# Altium PCB PCB1.PcbDoc (part 3 of 10)
Units mm, origin at the board's own origin, x right, y up, seen from the top; angles counter-clockwise.
Board outline 171.83 x 244.04 mm, 2 copper layers (Top Layer, Bottom Layer); 100 components, 186 nets, 878 pads, 221 vias.
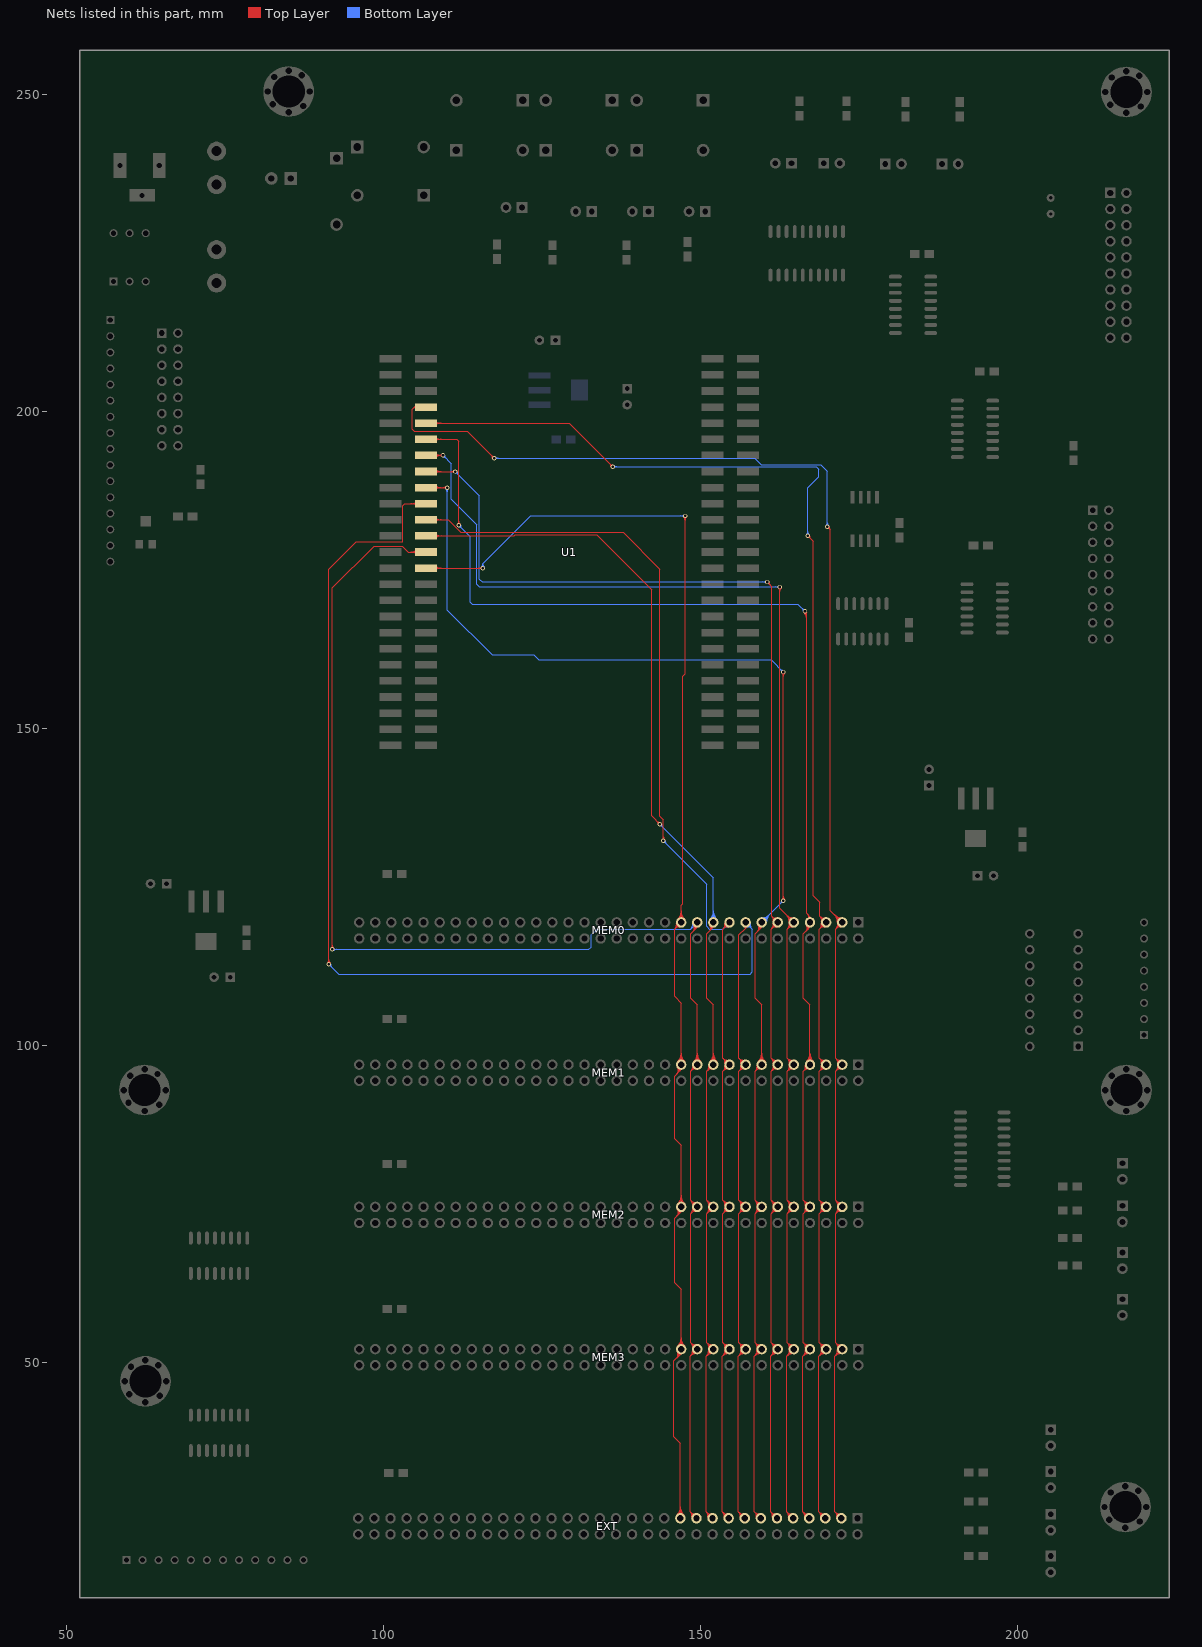
[diagram p3: the nets of this part, all layers, seen from the top]

## Via types
v1: diameter 0.7, hole 0.4, Top Layer to Bottom Layer, 221 vias

## Nets (pads, with @x,y where several pads share a name; then routed paths per layer and width w, separated by ;. In a path a pad name is that pad's centre, name@x,y a point inside that pad or via, vN(x,y) a via of type N, cw(c..) or ccw(c..) an arc to the next point about the centre after c; other vN are vias at no path point) (continued)
A01: EXT.3 MEM0.3 MEM1.3 MEM2.3 MEM3.3 U1.58 | length 294
  Top Layer w0.152: U1.58@105.026,200.518 ccw(c104.839,200.465) 104.839,200.66 ; U1.58@105.026,200.802 cw(c104.839,200.855) 104.839,200.66 ; U1.58@106.68,200.66 104.838,200.66 ; v1@117.176,192.608 ccw(c116.515,192.608) 116.982,193.076 ccw(c117.45,193.543) v1@117.45,192.882 ; v1(117.45,192.608) 113.208,196.85 104.838,196.85 104.521,197.167 104.521,200.343 104.838,200.66 ; v1@170.002,181.514 cw(c170.002,180.853) 170.47,181.32 cw(c170.937,181.788) v1@170.276,181.788 ; v1(170.002,181.788) 170.485,181.305 170.485,121.234 MEM0.3@172.339,119.38 171.298,118.339 ; EXT.3@171.475,25.531 ccw(c170.486,25.706) 171.196,26.416 ; MEM0.3@171.59,119.38 ccw(c169.782,119.38) 171.061,120.658 ccw(c172.339,121.937) MEM0.3@172.339,120.129 ; MEM3.3@171.593,52.008 cw(c170.227,51.896) 171.196,50.927 ; MEM3.3@171.599,52.186 ccw(c170.538,52.352) 171.298,53.111 ; MEM2.3@171.599,74.391 cw(c170.538,74.225) 171.298,73.465 ; MEM2.3@171.599,74.623 ccw(c170.538,74.789) 171.298,75.548 ; MEM1.3@171.599,96.827 cw(c170.538,96.661) 171.298,95.902 ; MEM1.3@171.599,97.059 ccw(c170.538,97.225) 171.298,97.985 ; MEM0.3@171.599,119.264 cw(c170.538,119.098) 171.298,118.339 ; EXT.3@171.625,25.504 ccw(c170.837,25.644) 171.403,26.209 ccw(c171.968,26.775) EXT.3@172.108,25.987 ; MEM0.3@171.743,119.38 ccw(c170.303,119.38) 171.321,120.398 ccw(c172.339,121.416) MEM0.3@172.339,119.976 ; MEM3.3@171.745,52.021 cw(c170.657,51.931) 171.429,51.16 cw(c172.2,50.388) MEM3.3@172.29,51.476 ; MEM3.3@171.75,52.162 ccw(c170.905,52.295) 171.51,52.899 ccw(c172.114,53.504) MEM3.3@172.247,52.659 ; MEM2.3@171.75,74.414 cw(c170.905,74.282) 171.51,73.677 cw(c172.114,73.073) MEM2.3@172.247,73.917 ; MEM2.3@171.75,74.599 ccw(c170.905,74.731) 171.51,75.336 ccw(c172.114,75.941) MEM2.3@172.247,75.096 ; MEM1.3@171.75,96.851 cw(c170.905,96.719) 171.51,96.114 cw(c172.114,95.509) MEM1.3@172.247,96.354 ; MEM1.3@171.75,97.036 ccw(c170.905,97.168) 171.51,97.773 ccw(c172.114,98.377) MEM1.3@172.247,97.533 ; MEM0.3@171.75,119.288 cw(c170.905,119.155) 171.51,118.551 cw(c172.114,117.946) MEM0.3@172.247,118.791 ; EXT.3@171.775,25.478 ccw(c171.189,25.581) 171.61,26.002 ccw(c172.031,26.423) EXT.3@172.134,25.837 ; MEM0.3@171.895,119.38 ccw(c170.823,119.38) 171.581,120.138 ccw(c172.339,120.896) MEM0.3@172.339,119.824 ; MEM3.3@171.897,52.034 cw(c171.087,51.967) 171.661,51.392 cw(c172.236,50.818) MEM3.3@172.303,51.628 ; MEM3.3@171.9,52.139 ccw(c171.271,52.237) 171.722,52.687 ccw(c172.172,53.138) MEM3.3@172.27,52.509 ; MEM2.3@171.9,74.438 cw(c171.271,74.339) 171.722,73.889 cw(c172.172,73.439) MEM2.3@172.27,74.068 ; MEM2.3@171.9,74.575 ccw(c171.271,74.674) 171.722,75.124 ccw(c172.172,75.574) MEM2.3@172.27,74.945 ; MEM1.3@171.9,96.875 cw(c171.271,96.776) 171.722,96.326 cw(c172.172,95.876) MEM1.3@172.27,96.505 ; MEM1.3@171.9,97.012 ccw(c171.271,97.111) 171.722,97.561 ccw(c172.172,98.011) MEM1.3@172.27,97.382 ; MEM0.3@171.9,119.311 cw(c171.271,119.213) 171.722,118.763 cw(c172.172,118.312) MEM0.3@172.27,118.941 ; EXT.3@172.081,26.137 cw(c171.906,27.126) 171.196,26.416 ; EXT.3@172.212,25.4 171.196,26.416 ; MEM3.3@172.223,52.81 cw(c172.057,53.871) 171.298,53.111 ; MEM2.3@172.223,73.767 ccw(c172.057,72.706) 171.298,73.465 ; MEM2.3@172.223,75.246 cw(c172.057,76.307) 171.298,75.548 ; MEM1.3@172.223,96.204 ccw(c172.057,95.143) 171.298,95.902 ; MEM1.3@172.223,97.683 cw(c172.057,98.744) 171.298,97.985 ; MEM0.3@172.223,118.64 ccw(c172.057,117.579) 171.298,118.339 ; MEM3.3@172.277,51.324 ccw(c172.165,49.958) 171.196,50.927 ; 171.196,26.416 171.196,50.927 ; 171.196,50.927 MEM3.3@172.339,52.07 171.298,53.111 ; 171.298,53.111 171.298,73.465 ; 171.298,73.465 MEM2.3@172.339,74.507 171.298,75.548 ; 171.298,75.548 171.298,95.902 ; 171.298,95.902 MEM1.3@172.339,96.943 171.298,97.985 ; 171.298,97.985 171.298,118.339
  Bottom Layer w0.152: v1(117.45,192.608) 158.525,192.608 159.592,191.541 168.971,191.541 170.002,190.509 v1(170.002,181.788) ; v1@117.643,192.415 cw(c118.111,191.947) 118.111,192.608 cw(c118.111,193.269) v1@117.643,192.802 ; v1@169.809,181.981 ccw(c169.341,182.449) 170.002,182.449 ccw(c170.663,182.449) v1@170.196,181.981
A02: EXT.5 MEM0.5 MEM1.5 MEM2.5 MEM3.5 U1.60 | length 287.1
  Top Layer w0.152: U1.60@106.68,198.12 129.286,198.12 v1(136.145,191.261) ; U1.60@108.093,197.857 cw(c108.727,197.223) 108.727,198.12 cw(c108.727,199.017) U1.60@108.093,198.383 ; U1.60@108.2,197.75 cw(c109.095,196.855) 109.095,198.12 cw(c109.095,199.385) U1.60@108.2,198.49 ; v1@135.871,191.261 ccw(c135.21,191.261) 135.677,191.729 ccw(c136.145,192.196) v1@136.145,191.535 ; v1@166.903,180.092 cw(c166.903,179.431) 167.371,179.898 cw(c167.838,180.365) v1@167.177,180.365 ; v1(166.903,180.365) 167.767,179.502 167.767,123.571 168.808,122.53 168.808,120.371 ; EXT.5@168.935,25.531 ccw(c167.946,25.706) 168.656,26.416 ; MEM3.5@169.053,52.008 cw(c167.687,51.896) 168.656,50.927 ; MEM3.5@169.059,52.186 ccw(c167.998,52.352) 168.758,53.111 ; MEM2.5@169.059,74.391 cw(c167.998,74.225) 168.758,73.465 ; MEM2.5@169.059,74.623 ccw(c167.998,74.789) 168.758,75.548 ; MEM1.5@169.059,96.827 cw(c167.998,96.661) 168.758,95.902 ; MEM1.5@169.059,97.059 ccw(c167.998,97.225) 168.758,97.985 ; MEM0.5@169.059,119.264 cw(c167.998,119.098) 168.758,118.339 ; MEM0.5@169.065,119.526 ccw(c168.147,119.709) 168.808,120.371 ; EXT.5@169.085,25.504 ccw(c168.297,25.644) 168.863,26.209 ccw(c169.428,26.775) EXT.5@169.568,25.987 ; MEM3.5@169.205,52.021 cw(c168.117,51.931) 168.889,51.16 cw(c169.66,50.388) MEM3.5@169.75,51.476 ; MEM3.5@169.21,52.162 ccw(c168.365,52.295) 168.97,52.899 ccw(c169.574,53.504) MEM3.5@169.707,52.659 ; MEM2.5@169.21,74.414 cw(c168.365,74.282) 168.97,73.677 cw(c169.574,73.073) MEM2.5@169.707,73.917 ; MEM2.5@169.21,74.599 ccw(c168.365,74.731) 168.97,75.336 ccw(c169.574,75.941) MEM2.5@169.707,75.096 ; MEM1.5@169.21,96.851 cw(c168.365,96.719) 168.97,96.114 cw(c169.574,95.509) MEM1.5@169.707,96.354 ; MEM1.5@169.21,97.036 ccw(c168.365,97.168) 168.97,97.773 ccw(c169.574,98.377) MEM1.5@169.707,97.533 ; MEM0.5@169.21,119.288 cw(c168.365,119.155) 168.97,118.551 cw(c169.574,117.946) MEM0.5@169.707,118.791 ; MEM0.5@169.214,119.496 ccw(c168.483,119.642) 169.01,120.169 ccw(c169.537,120.696) MEM0.5@169.683,119.965 ; EXT.5@169.235,25.478 ccw(c168.649,25.581) 169.07,26.002 ccw(c169.491,26.423) EXT.5@169.594,25.837 ; MEM3.5@169.357,52.034 cw(c168.547,51.967) 169.121,51.392 cw(c169.696,50.818) MEM3.5@169.763,51.628 ; MEM3.5@169.36,52.139 ccw(c168.731,52.237) 169.182,52.687 ccw(c169.632,53.138) MEM3.5@169.73,52.509 ; MEM2.5@169.36,74.438 cw(c168.731,74.339) 169.182,73.889 cw(c169.632,73.439) MEM2.5@169.73,74.068 ; MEM2.5@169.36,74.575 ccw(c168.731,74.674) 169.182,75.124 ccw(c169.632,75.574) MEM2.5@169.73,74.945 ; MEM1.5@169.36,96.875 cw(c168.731,96.776) 169.182,96.326 cw(c169.632,95.876) MEM1.5@169.73,96.505 ; MEM1.5@169.36,97.012 ccw(c168.731,97.111) 169.182,97.561 ccw(c169.632,98.011) MEM1.5@169.73,97.382 ; MEM0.5@169.36,119.311 cw(c168.731,119.213) 169.182,118.763 cw(c169.632,118.312) MEM0.5@169.73,118.941 ; MEM0.5@169.364,119.467 ccw(c168.819,119.575) 169.212,119.967 ccw(c169.604,120.36) MEM0.5@169.712,119.815 ; EXT.5@169.541,26.137 cw(c169.366,27.126) 168.656,26.416 ; MEM0.5@169.653,120.114 cw(c169.47,121.032) 168.808,120.371 ; EXT.5@169.672,25.4 168.656,26.416 ; MEM3.5@169.683,52.81 cw(c169.517,53.871) 168.758,53.111 ; MEM2.5@169.683,73.767 ccw(c169.517,72.706) 168.758,73.465 ; MEM2.5@169.683,75.246 cw(c169.517,76.307) 168.758,75.548 ; MEM1.5@169.683,96.204 ccw(c169.517,95.143) 168.758,95.902 ; MEM1.5@169.683,97.683 cw(c169.517,98.744) 168.758,97.985 ; MEM0.5@169.683,118.64 ccw(c169.517,117.579) 168.758,118.339 ; MEM3.5@169.737,51.324 ccw(c169.625,49.958) 168.656,50.927 ; 168.656,26.416 168.656,50.927 ; 168.656,50.927 MEM3.5@169.799,52.07 168.758,53.111 ; 168.758,53.111 168.758,73.465 ; 168.758,73.465 MEM2.5@169.799,74.507 168.758,75.548 ; 168.758,75.548 168.758,95.902 ; 168.758,95.902 MEM1.5@169.799,96.943 168.758,97.985 ; 168.758,97.985 168.758,118.339 ; 168.758,118.339 MEM0.5@169.799,119.38 168.808,120.371
  Bottom Layer w0.152: v1(136.145,191.261) 168.275,191.261 168.656,190.88 168.656,189.662 166.903,187.909 v1(166.903,180.365) ; v1@136.338,191.068 cw(c136.806,190.6) 136.806,191.261 cw(c136.806,191.922) v1@136.338,191.455 ; v1@166.71,180.559 ccw(c166.242,181.026) 166.903,181.026 ccw(c167.564,181.026) v1@167.097,180.559
A03: EXT.7 MEM0.7 MEM1.7 MEM2.7 MEM3.7 U1.62 | length 287.2
  Top Layer w0.152: U1.62@106.68,195.58 111.544,195.58 111.862,195.262 v1(111.862,182.016) ; U1.62@108.093,195.317 cw(c108.727,194.683) 108.727,195.58 cw(c108.727,196.477) U1.62@108.093,195.843 ; U1.62@108.2,195.21 cw(c109.095,194.315) 109.095,195.58 cw(c109.095,196.845) U1.62@108.2,195.95 ; v1@111.668,182.21 ccw(c111.201,182.677) 111.862,182.677 ccw(c112.523,182.677) v1@112.055,182.21 ; v1@166.278,168.259 cw(c165.197,167.179) 166.726,167.179 ; v1@166.386,168.367 cw(c165.565,167.547) 166.726,167.547 ; EXT.7@166.395,25.531 ccw(c165.406,25.706) 166.116,26.416 ; v1(166.472,168.453) 166.726,168.199 166.726,120.802 167.259,120.269 MEM0.7@167.259,119.38 167.259,118.618 166.218,117.577 166.218,107.417 167.259,106.375 MEM1.7@167.259,96.943 166.218,95.902 ; v1@166.494,168.475 cw(c165.933,167.914) 166.726,167.914 ; MEM3.7@166.513,52.008 cw(c165.147,51.896) 166.116,50.927 ; MEM3.7@166.519,52.186 ccw(c165.458,52.352) 166.218,53.111 ; MEM2.7@166.519,74.391 cw(c165.458,74.225) 166.218,73.465 ; MEM2.7@166.519,74.623 ccw(c165.458,74.789) 166.218,75.548 ; MEM1.7@166.519,96.827 cw(c165.458,96.661) 166.218,95.902 ; EXT.7@166.545,25.504 ccw(c165.757,25.644) 166.323,26.209 ccw(c166.888,26.775) EXT.7@167.028,25.987 ; 166.599,117.958 ccw(c166.077,118.479) MEM0.7@166.664,118.926 ; MEM3.7@166.665,52.021 cw(c165.577,51.931) 166.349,51.16 cw(c167.12,50.388) MEM3.7@167.21,51.476 ; MEM3.7@166.67,52.162 ccw(c165.825,52.295) 166.43,52.899 ccw(c167.034,53.504) MEM3.7@167.167,52.659 ; MEM2.7@166.67,74.414 cw(c165.825,74.282) 166.43,73.677 cw(c167.034,73.073) MEM2.7@167.167,73.917 ; MEM2.7@166.67,74.599 ccw(c165.825,74.731) 166.43,75.336 ccw(c167.034,75.941) MEM2.7@167.167,75.096 ; MEM1.7@166.67,96.851 cw(c165.825,96.719) 166.43,96.114 cw(c167.034,95.509) MEM1.7@167.167,96.354 ; EXT.7@166.695,25.478 ccw(c166.109,25.581) 166.53,26.002 ccw(c166.951,26.423) EXT.7@167.054,25.837 ; 166.722,118.081 ccw(c166.217,118.586) MEM0.7@166.785,119.018 ; MEM1.7@166.73,97.473 ccw(c165.451,98.751) 167.259,98.751 ccw(c169.067,98.751) MEM1.7@167.788,97.473 ; 166.753,120.775 cw(c165.94,119.962) MEM0.7@166.992,119.498 ; MEM3.7@166.817,52.034 cw(c166.007,51.967) 166.581,51.392 cw(c167.156,50.818) MEM3.7@167.223,51.628 ; MEM3.7@166.82,52.139 ccw(c166.191,52.237) 166.642,52.687 ccw(c167.092,53.138) MEM3.7@167.19,52.509 ; MEM2.7@166.82,74.438 cw(c166.191,74.339) 166.642,73.889 cw(c167.092,73.439) MEM2.7@167.19,74.068 ; MEM2.7@166.82,74.575 ccw(c166.191,74.674) 166.642,75.124 ccw(c167.092,75.574) MEM2.7@167.19,74.945 ; MEM1.7@166.82,96.875 cw(c166.191,96.776) 166.642,96.326 cw(c167.092,95.876) MEM1.7@167.19,96.505 ; MEM1.7@166.837,97.365 ccw(c165.819,98.383) 167.259,98.383 ccw(c168.699,98.383) MEM1.7@167.681,97.365 ; 166.845,118.204 ccw(c166.357,118.692) MEM0.7@166.906,119.111 ; 166.911,120.617 cw(c166.159,119.865) MEM0.7@167.132,119.436 ; MEM1.7@166.945,97.257 ccw(c166.187,98.015) 167.259,98.015 ccw(c168.331,98.015) MEM1.7@167.573,97.257 ; 166.968,118.327 ccw(c166.497,118.799) MEM0.7@167.027,119.203 ; EXT.7@167.001,26.137 cw(c166.826,27.126) 166.116,26.416 ; 167.068,120.46 cw(c166.377,119.769) MEM0.7@167.271,119.375 ; 167.092,118.451 ccw(c166.637,118.906) MEM0.7@167.148,119.296 ; EXT.7@167.132,25.4 166.116,26.416 ; MEM3.7@167.143,52.81 cw(c166.977,53.871) 166.218,53.111 ; MEM2.7@167.143,73.767 ccw(c166.977,72.706) 166.218,73.465 ; MEM2.7@167.143,75.246 cw(c166.977,76.307) 166.218,75.548 ; MEM1.7@167.143,96.204 ccw(c166.977,95.143) 166.218,95.902 ; MEM3.7@167.197,51.324 ccw(c167.085,49.958) 166.116,50.927 ; 167.225,120.303 cw(c166.595,119.673) MEM0.7@167.411,119.313 ; 166.116,26.416 166.116,50.927 ; 166.116,50.927 MEM3.7@167.259,52.07 166.218,53.111 ; 166.218,53.111 166.218,73.465 ; 166.218,73.465 MEM2.7@167.259,74.507 166.218,75.548 ; 166.218,75.548 166.218,95.902
  Bottom Layer w0.152: v1@111.862,181.743 cw(c111.862,181.082) 112.329,181.549 cw(c112.796,182.016) v1@112.135,182.016 ; v1(111.862,182.016) 113.665,180.213 113.665,169.888 113.983,169.57 165.354,169.57 v1(166.472,168.453) ; v1@166.198,168.453 ccw(c165.537,168.453) 166.004,168.92 ccw(c166.472,169.388) v1@166.472,168.727
A04: EXT.9 MEM0.9 MEM1.9 MEM2.9 MEM3.9 U1.64 | length 278.1
  Top Layer w0.152: U1.64@106.68,193.04 v1(109.372,193.04) ; U1.64@108.093,192.777 cw(c108.727,192.143) 108.727,193.04 cw(c108.727,193.937) U1.64@108.093,193.303 ; U1.64@108.2,192.67 cw(c109.095,191.775) 109.095,193.04 cw(c109.095,194.305) U1.64@108.2,193.41 ; v1@109.179,192.846 ccw(c108.711,192.379) 108.711,193.04 ccw(c108.711,193.701) v1@109.179,193.234 ; v1@162.316,172.095 cw(c161.848,171.627) 162.509,171.627 cw(c163.17,171.627) v1@162.703,172.095 ; v1(162.509,172.288) 162.509,121.59 MEM0.9@164.719,119.38 163.678,118.339 ; EXT.9@163.855,25.531 ccw(c162.866,25.706) 163.576,26.416 ; MEM0.9@163.97,119.38 ccw(c162.162,119.38) 163.441,120.658 ccw(c164.719,121.937) MEM0.9@164.719,120.129 ; MEM3.9@163.973,52.008 cw(c162.607,51.896) 163.576,50.927 ; MEM3.9@163.979,52.186 ccw(c162.918,52.352) 163.678,53.111 ; MEM2.9@163.979,74.391 cw(c162.918,74.225) 163.678,73.465 ; MEM2.9@163.979,74.623 ccw(c162.918,74.789) 163.678,75.548 ; MEM1.9@163.979,96.827 cw(c162.918,96.661) 163.678,95.902 ; MEM1.9@163.979,97.059 ccw(c162.918,97.225) 163.678,97.985 ; MEM0.9@163.979,119.264 cw(c162.918,119.098) 163.678,118.339 ; EXT.9@164.005,25.504 ccw(c163.217,25.644) 163.783,26.209 ccw(c164.348,26.775) EXT.9@164.488,25.987 ; MEM0.9@164.123,119.38 ccw(c162.683,119.38) 163.701,120.398 ccw(c164.719,121.416) MEM0.9@164.719,119.976 ; MEM3.9@164.125,52.021 cw(c163.037,51.931) 163.809,51.16 cw(c164.58,50.388) MEM3.9@164.67,51.476 ; MEM3.9@164.13,52.162 ccw(c163.285,52.295) 163.89,52.899 ccw(c164.494,53.504) MEM3.9@164.627,52.659 ; MEM2.9@164.13,74.414 cw(c163.285,74.282) 163.89,73.677 cw(c164.494,73.073) MEM2.9@164.627,73.917 ; MEM2.9@164.13,74.599 ccw(c163.285,74.731) 163.89,75.336 ccw(c164.494,75.941) MEM2.9@164.627,75.096 ; MEM1.9@164.13,96.851 cw(c163.285,96.719) 163.89,96.114 cw(c164.494,95.509) MEM1.9@164.627,96.354 ; MEM1.9@164.13,97.036 ccw(c163.285,97.168) 163.89,97.773 ccw(c164.494,98.377) MEM1.9@164.627,97.533 ; MEM0.9@164.13,119.288 cw(c163.285,119.155) 163.89,118.551 cw(c164.494,117.946) MEM0.9@164.627,118.791 ; EXT.9@164.155,25.478 ccw(c163.569,25.581) 163.99,26.002 ccw(c164.411,26.423) EXT.9@164.514,25.837 ; MEM0.9@164.275,119.38 ccw(c163.203,119.38) 163.961,120.138 ccw(c164.719,120.896) MEM0.9@164.719,119.824 ; MEM3.9@164.277,52.034 cw(c163.467,51.967) 164.041,51.392 cw(c164.616,50.818) MEM3.9@164.683,51.628 ; MEM3.9@164.28,52.139 ccw(c163.651,52.237) 164.102,52.687 ccw(c164.552,53.138) MEM3.9@164.65,52.509 ; MEM2.9@164.28,74.438 cw(c163.651,74.339) 164.102,73.889 cw(c164.552,73.439) MEM2.9@164.65,74.068 ; MEM2.9@164.28,74.575 ccw(c163.651,74.674) 164.102,75.124 ccw(c164.552,75.574) MEM2.9@164.65,74.945 ; MEM1.9@164.28,96.875 cw(c163.651,96.776) 164.102,96.326 cw(c164.552,95.876) MEM1.9@164.65,96.505 ; MEM1.9@164.28,97.012 ccw(c163.651,97.111) 164.102,97.561 ccw(c164.552,98.011) MEM1.9@164.65,97.382 ; MEM0.9@164.28,119.311 cw(c163.651,119.213) 164.102,118.763 cw(c164.552,118.312) MEM0.9@164.65,118.941 ; EXT.9@164.461,26.137 cw(c164.286,27.126) 163.576,26.416 ; EXT.9@164.592,25.4 163.576,26.416 ; MEM3.9@164.603,52.81 cw(c164.437,53.871) 163.678,53.111 ; MEM2.9@164.603,73.767 ccw(c164.437,72.706) 163.678,73.465 ; MEM2.9@164.603,75.246 cw(c164.437,76.307) 163.678,75.548 ; MEM1.9@164.603,96.204 ccw(c164.437,95.143) 163.678,95.902 ; MEM1.9@164.603,97.683 cw(c164.437,98.744) 163.678,97.985 ; MEM0.9@164.603,118.64 ccw(c164.437,117.579) 163.678,118.339 ; MEM3.9@164.657,51.324 ccw(c164.545,49.958) 163.576,50.927 ; 163.576,26.416 163.576,50.927 ; 163.576,50.927 MEM3.9@164.719,52.07 163.678,53.111 ; 163.678,53.111 163.678,73.465 ; 163.678,73.465 MEM2.9@164.719,74.507 163.678,75.548 ; 163.678,75.548 163.678,95.902 ; 163.678,95.902 MEM1.9@164.719,96.943 163.678,97.985 ; 163.678,97.985 163.678,118.339
  Bottom Layer w0.152: v1@109.372,192.766 cw(c109.372,192.105) 109.84,192.573 cw(c110.307,193.04) v1@109.646,193.04 ; v1(109.372,193.04) 110.668,191.745 110.668,186.131 114.681,182.118 114.681,172.72 115.113,172.288 v1(162.509,172.288) ; v1@162.316,172.095 ccw(c161.848,171.627) 161.848,172.288 ccw(c161.848,172.949) v1@162.316,172.482
A05: EXT.11 MEM0.11 MEM1.11 MEM2.11 MEM3.11 U1.66 | length 270.4
  Top Layer w0.152: U1.66@106.68,190.5 v1(111.303,190.5) ; U1.66@108.093,190.237 cw(c108.727,189.603) 108.727,190.5 cw(c108.727,191.397) U1.66@108.093,190.763 ; U1.66@108.2,190.13 cw(c109.095,189.235) 109.095,190.5 cw(c109.095,191.765) U1.66@108.2,190.87 ; v1@111.109,190.306 ccw(c110.642,189.839) 110.642,190.5 ccw(c110.642,191.161) v1@111.109,190.694 ; v1@160.503,172.802 cw(c160.503,172.141) 160.97,172.608 cw(c161.437,173.076) v1@160.776,173.076 ; v1(160.503,173.076) 161.235,172.343 161.235,120.324 ; EXT.11@161.315,25.531 ccw(c160.326,25.706) 161.036,26.416 ; MEM3.11@161.433,52.008 cw(c160.067,51.896) 161.036,50.927 ; MEM3.11@161.439,52.186 ccw(c160.378,52.352) 161.138,53.111 ; MEM2.11@161.439,74.391 cw(c160.378,74.225) 161.138,73.465 ; MEM2.11@161.439,74.623 ccw(c160.378,74.789) 161.138,75.548 ; MEM1.11@161.439,96.827 cw(c160.378,96.661) 161.138,95.902 ; MEM1.11@161.439,97.059 ccw(c160.378,97.225) 161.138,97.985 ; MEM0.11@161.439,119.264 cw(c160.378,119.098) 161.138,118.339 ; MEM0.11@161.451,119.556 ccw(c160.659,119.748) 161.235,120.324 ; EXT.11@161.465,25.504 ccw(c160.677,25.644) 161.243,26.209 ccw(c161.808,26.775) EXT.11@161.948,25.987 ; MEM3.11@161.585,52.021 cw(c160.497,51.931) 161.269,51.16 cw(c162.04,50.388) MEM3.11@162.13,51.476 ; MEM3.11@161.59,52.162 ccw(c160.745,52.295) 161.35,52.899 ccw(c161.954,53.504) MEM3.11@162.087,52.659 ; MEM2.11@161.59,74.414 cw(c160.745,74.282) 161.35,73.677 cw(c161.954,73.073) MEM2.11@162.087,73.917 ; MEM2.11@161.59,74.599 ccw(c160.745,74.731) 161.35,75.336 ccw(c161.954,75.941) MEM2.11@162.087,75.096 ; MEM1.11@161.59,96.851 cw(c160.745,96.719) 161.35,96.114 cw(c161.954,95.509) MEM1.11@162.087,96.354 ; MEM1.11@161.59,97.036 ccw(c160.745,97.168) 161.35,97.773 ccw(c161.954,98.377) MEM1.11@162.087,97.533 ; MEM0.11@161.59,119.288 cw(c160.745,119.155) 161.35,118.551 cw(c161.954,117.946) MEM0.11@162.087,118.791 ; MEM0.11@161.599,119.52 ccw(c160.969,119.673) 161.427,120.132 ccw(c161.886,120.59) MEM0.11@162.039,119.96 ; EXT.11@161.615,25.478 ccw(c161.029,25.581) 161.45,26.002 ccw(c161.871,26.423) EXT.11@161.974,25.837 ; MEM3.11@161.737,52.034 cw(c160.927,51.967) 161.501,51.392 cw(c162.076,50.818) MEM3.11@162.143,51.628 ; MEM3.11@161.74,52.139 ccw(c161.111,52.237) 161.562,52.687 ccw(c162.012,53.138) MEM3.11@162.11,52.509 ; MEM2.11@161.74,74.438 cw(c161.111,74.339) 161.562,73.889 cw(c162.012,73.439) MEM2.11@162.11,74.068 ; MEM2.11@161.74,74.575 ccw(c161.111,74.674) 161.562,75.124 ccw(c162.012,75.574) MEM2.11@162.11,74.945 ; MEM1.11@161.74,96.875 cw(c161.111,96.776) 161.562,96.326 cw(c162.012,95.876) MEM1.11@162.11,96.505 ; MEM1.11@161.74,97.012 ccw(c161.111,97.111) 161.562,97.561 ccw(c162.012,98.011) MEM1.11@162.11,97.382 ; MEM0.11@161.74,119.311 cw(c161.111,119.213) 161.562,118.763 cw(c162.012,118.312) MEM0.11@162.11,118.941 ; EXT.11@161.921,26.137 cw(c161.746,27.126) 161.036,26.416 ; MEM0.11@162.003,120.108 cw(c161.811,120.9) 161.235,120.324 ; EXT.11@162.052,25.4 161.036,26.416 ; MEM3.11@162.063,52.81 cw(c161.897,53.871) 161.138,53.111 ; MEM2.11@162.063,73.767 ccw(c161.897,72.706) 161.138,73.465 ; MEM2.11@162.063,75.246 cw(c161.897,76.307) 161.138,75.548 ; MEM1.11@162.063,96.204 ccw(c161.897,95.143) 161.138,95.902 ; MEM1.11@162.063,97.683 cw(c161.897,98.744) 161.138,97.985 ; MEM0.11@162.063,118.64 ccw(c161.897,117.579) 161.138,118.339 ; MEM3.11@162.117,51.324 ccw(c162.005,49.958) 161.036,50.927 ; 161.036,26.416 161.036,50.927 ; 161.036,50.927 MEM3.11@162.179,52.07 161.138,53.111 ; 161.138,53.111 161.138,73.465 ; 161.138,73.465 MEM2.11@162.179,74.507 161.138,75.548 ; 161.138,75.548 161.138,95.902 ; 161.138,95.902 MEM1.11@162.179,96.943 161.138,97.985 ; 161.138,97.985 161.138,118.339 ; 161.138,118.339 MEM0.11@162.179,119.38 161.235,120.324
  Bottom Layer w0.152: v1@111.303,190.226 cw(c111.303,189.565) 111.77,190.033 cw(c112.238,190.5) v1@111.577,190.5 ; v1(111.303,190.5) 115.113,186.69 115.113,173.533 115.57,173.076 v1(160.503,173.076) ; v1@160.309,172.882 ccw(c159.842,172.415) 159.842,173.076 ccw(c159.842,173.737) v1@160.309,173.269
A06: EXT.13 MEM0.13 MEM1.13 MEM2.13 MEM3.13 U1.68 | length 275.9
  Top Layer w0.152: U1.68@106.68,187.96 v1(110.007,187.96) ; U1.68@108.093,187.697 cw(c108.727,187.063) 108.727,187.96 cw(c108.727,188.857) U1.68@108.093,188.223 ; U1.68@108.2,187.59 cw(c109.095,186.695) 109.095,187.96 cw(c109.095,189.225) U1.68@108.2,188.33 ; v1@109.814,187.766 ccw(c109.346,187.299) 109.346,187.96 ccw(c109.346,188.621) v1@109.814,188.154 ; EXT.13@158.775,25.531 ccw(c157.786,25.706) 158.496,26.416 ; MEM3.13@158.893,52.008 cw(c157.527,51.896) 158.496,50.927 ; MEM3.13@158.899,52.186 ccw(c157.838,52.352) 158.598,53.111 ; MEM2.13@158.899,74.391 cw(c157.838,74.225) 158.598,73.465 ; MEM2.13@158.899,74.623 ccw(c157.838,74.789) 158.598,75.548 ; MEM1.13@158.899,96.827 cw(c157.838,96.661) 158.598,95.902 ; EXT.13@158.925,25.504 ccw(c158.137,25.644) 158.703,26.209 ccw(c159.268,26.775) EXT.13@159.408,25.987 ; 158.979,117.958 ccw(c158.457,118.479) MEM0.13@159.044,118.926 ; MEM3.13@159.045,52.021 cw(c157.957,51.931) 158.729,51.16 cw(c159.5,50.388) MEM3.13@159.59,51.476 ; MEM3.13@159.05,52.162 ccw(c158.205,52.295) 158.81,52.899 ccw(c159.414,53.504) MEM3.13@159.547,52.659 ; MEM2.13@159.05,74.414 cw(c158.205,74.282) 158.81,73.677 cw(c159.414,73.073) MEM2.13@159.547,73.917 ; MEM2.13@159.05,74.599 ccw(c158.205,74.731) 158.81,75.336 ccw(c159.414,75.941) MEM2.13@159.547,75.096 ; MEM1.13@159.05,96.851 cw(c158.205,96.719) 158.81,96.114 cw(c159.414,95.509) MEM1.13@159.547,96.354 ; EXT.13@159.075,25.478 ccw(c158.489,25.581) 158.91,26.002 ccw(c159.331,26.423) EXT.13@159.434,25.837 ; 159.102,118.081 ccw(c158.597,118.586) MEM0.13@159.165,119.018 ; MEM1.13@159.11,97.473 ccw(c157.831,98.751) 159.639,98.751 ccw(c161.447,98.751) MEM1.13@160.168,97.473 ; MEM3.13@159.197,52.034 cw(c158.387,51.967) 158.961,51.392 cw(c159.536,50.818) MEM3.13@159.603,51.628 ; MEM3.13@159.2,52.139 ccw(c158.571,52.237) 159.022,52.687 ccw(c159.472,53.138) MEM3.13@159.57,52.509 ; MEM2.13@159.2,74.438 cw(c158.571,74.339) 159.022,73.889 cw(c159.472,73.439) MEM2.13@159.57,74.068 ; MEM2.13@159.2,74.575 ccw(c158.571,74.674) 159.022,75.124 ccw(c159.472,75.574) MEM2.13@159.57,74.945 ; MEM1.13@159.2,96.875 cw(c158.571,96.776) 159.022,96.326 cw(c159.472,95.876) MEM1.13@159.57,96.505 ; MEM1.13@159.217,97.365 ccw(c158.199,98.383) 159.639,98.383 ccw(c161.079,98.383) MEM1.13@160.061,97.365 ; 159.225,118.204 ccw(c158.737,118.692) MEM0.13@159.286,119.111 ; MEM1.13@159.325,97.257 ccw(c158.567,98.015) 159.639,98.015 ccw(c160.711,98.015) MEM1.13@159.953,97.257 ; 159.348,118.327 ccw(c158.877,118.799) MEM0.13@159.407,119.203 ; EXT.13@159.381,26.137 cw(c159.206,27.126) 158.496,26.416 ; 159.472,118.451 ccw(c159.017,118.906) MEM0.13@159.528,119.296 ; EXT.13@159.512,25.4 158.496,26.416 ; MEM3.13@159.523,52.81 cw(c159.357,53.871) 158.598,53.111 ; MEM2.13@159.523,73.767 ccw(c159.357,72.706) 158.598,73.465 ; MEM2.13@159.523,75.246 cw(c159.357,76.307) 158.598,75.548 ; MEM1.13@159.523,96.204 ccw(c159.357,95.143) 158.598,95.902 ; MEM3.13@159.577,51.324 ccw(c159.465,49.958) 158.496,50.927 ; MEM0.13@159.639,119.38 159.639,118.618 158.598,117.577 158.598,107.417 159.639,106.375 MEM1.13@159.639,96.943 158.598,95.902 ; v1@162.874,123.003 ccw(c162.407,123.47) 163.068,123.47 ccw(c163.729,123.47) v1@163.262,123.003 ; v1@162.874,158.683 cw(c162.407,158.216) 163.068,158.216 cw(c163.729,158.216) v1@163.262,158.683 ; v1(163.068,122.809) v1(163.068,158.877) ; 158.496,26.416 158.496,50.927 ; 158.496,50.927 MEM3.13@159.639,52.07 158.598,53.111 ; 158.598,53.111 158.598,73.465 ; 158.598,73.465 MEM2.13@159.639,74.507 158.598,75.548 ; 158.598,75.548 158.598,95.902
  Bottom Layer w0.152: v1@109.814,187.766 cw(c109.346,187.299) 110.007,187.299 cw(c110.668,187.299) v1@110.201,187.766 ; v1(110.007,187.96) 110.007,168.656 117.103,161.561 123.707,161.561 124.491,160.776 161.169,160.776 v1(163.068,158.877) ; MEM0.13@159.639,119.38 v1(163.068,122.809) ; MEM0.13@159.639,119.824 ccw(c159.639,120.896) 160.397,120.138 ccw(c161.155,119.38) MEM0.13@160.083,119.38 ; MEM0.13@159.639,119.976 ccw(c159.639,121.416) 160.657,120.398 ccw(c161.675,119.38) MEM0.13@160.235,119.38 ; MEM0.13@159.639,120.129 ccw(c159.639,121.937) 160.917,120.658 ccw(c162.196,119.38) MEM0.13@160.388,119.38 ; v1@162.794,122.809 cw(c162.133,122.809) 162.601,122.342 cw(c163.068,121.874) v1@163.068,122.535 ; v1@162.794,158.877 ccw(c162.133,158.877) 162.601,159.344 ccw(c163.068,159.812) v1@163.068,159.151
A07: EXT.15 MEM0.15 MEM1.15 MEM2.15 MEM3.15 U1.70 | length 303.8
  Top Layer w0.152: v1@91.17,112.995 ccw(c90.703,113.462) 91.364,113.462 ccw(c92.025,113.462) v1@91.557,112.995 ; v1(91.364,112.801) 91.364,175.057 95.72,179.413 103.022,179.413 103.048,179.438 103.048,185.102 103.365,185.42 U1.70@106.68,185.42 ; U1.70@105.16,185.05 ccw(c104.265,184.155) 104.265,185.42 ccw(c104.265,186.685) U1.70@105.16,185.79 ; U1.70@105.267,185.157 ccw(c104.633,184.523) 104.633,185.42 ccw(c104.633,186.317) U1.70@105.267,185.683 ; EXT.15@156.235,25.531 ccw(c155.246,25.706) 155.956,26.416 ; MEM3.15@156.353,52.008 cw(c154.987,51.896) 155.956,50.927 ; MEM3.15@156.359,52.186 ccw(c155.298,52.352) 156.058,53.111 ; MEM2.15@156.359,74.391 cw(c155.298,74.225) 156.058,73.465 ; MEM2.15@156.359,74.623 ccw(c155.298,74.789) 156.058,75.548 ; MEM1.15@156.359,96.827 cw(c155.298,96.661) 156.058,95.902 ; MEM1.15@156.359,97.059 ccw(c155.298,97.225) 156.058,97.985 ; EXT.15@156.385,25.504 ccw(c155.597,25.644) 156.163,26.209 ccw(c156.728,26.775) EXT.15@156.868,25.987 ; MEM3.15@156.505,52.021 cw(c155.417,51.931) 156.189,51.16 cw(c156.96,50.388) MEM3.15@157.05,51.476 ; MEM3.15@156.51,52.162 ccw(c155.665,52.295) 156.27,52.899 ccw(c156.874,53.504) MEM3.15@157.007,52.659 ; MEM2.15@156.51,74.414 cw(c155.665,74.282) 156.27,73.677 cw(c156.874,73.073) MEM2.15@157.007,73.917 ; MEM2.15@156.51,74.599 ccw(c155.665,74.731) 156.27,75.336 ccw(c156.874,75.941) MEM2.15@157.007,75.096 ; MEM1.15@156.51,96.851 cw(c155.665,96.719) 156.27,96.114 cw(c156.874,95.509) MEM1.15@157.007,96.354 ; MEM1.15@156.51,97.036 ccw(c155.665,97.168) 156.27,97.773 ccw(c156.874,98.377) MEM1.15@157.007,97.533 ; EXT.15@156.535,25.478 ccw(c155.949,25.581) 156.37,26.002 ccw(c156.791,26.423) EXT.15@156.894,25.837 ; MEM3.15@156.657,52.034 cw(c155.847,51.967) 156.421,51.392 cw(c156.996,50.818) MEM3.15@157.063,51.628 ; MEM3.15@156.66,52.139 ccw(c156.031,52.237) 156.482,52.687 ccw(c156.932,53.138) MEM3.15@157.03,52.509 ; MEM2.15@156.66,74.438 cw(c156.031,74.339) 156.482,73.889 cw(c156.932,73.439) MEM2.15@157.03,74.068 ; MEM2.15@156.66,74.575 ccw(c156.031,74.674) 156.482,75.124 ccw(c156.932,75.574) MEM2.15@157.03,74.945 ; MEM1.15@156.66,96.875 cw(c156.031,96.776) 156.482,96.326 cw(c156.932,95.876) MEM1.15@157.03,96.505 ; MEM1.15@156.66,97.012 ccw(c156.031,97.111) 156.482,97.561 ccw(c156.932,98.011) MEM1.15@157.03,97.382 ; EXT.15@156.841,26.137 cw(c156.666,27.126) 155.956,26.416 ; MEM0.15@156.932,118.65 cw(c156.884,118.44) 157.099,118.44 ; EXT.15@156.972,25.4 155.956,26.416 ; MEM3.15@156.983,52.81 cw(c156.817,53.871) 156.058,53.111 ; MEM2.15@156.983,73.767 ccw(c156.817,72.706) 156.058,73.465 ; MEM2.15@156.983,75.246 cw(c156.817,76.307) 156.058,75.548 ; MEM1.15@156.983,96.204 ccw(c156.817,95.143) 156.058,95.902 ; MEM1.15@156.983,97.683 cw(c156.817,98.744) 156.058,97.985 ; MEM3.15@157.037,51.324 ccw(c156.925,49.958) 155.956,50.927 ; MEM0.15@157.099,119.38 157.099,118.44 ; MEM0.15@157.266,118.65 ccw(c157.314,118.44) 157.099,118.44 ; 155.956,26.416 155.956,50.927 ; 155.956,50.927 MEM3.15@157.099,52.07 156.058,53.111 ; 156.058,53.111 156.058,73.465 ; 156.058,73.465 MEM2.15@157.099,74.507 156.058,75.548 ; 156.058,75.548 156.058,95.902 ; 156.058,95.902 MEM1.15@157.099,96.943 156.058,97.985 ; 156.058,97.985 156.058,117.399 157.099,118.44
  Bottom Layer w0.152: v1@91.364,112.528 cw(c91.364,111.867) 91.831,112.334 cw(c92.299,112.801) v1@91.638,112.801 ; v1(91.364,112.801) 92.939,111.227 157.797,111.227 158.14,111.569 158.14,118.339 ; MEM0.15@157.099,119.38 158.14,118.339 ; MEM0.15@157.168,118.941 cw(c157.266,118.312) 157.716,118.763 cw(c158.167,119.213) MEM0.15@157.538,119.311 ; MEM0.15@157.191,118.791 cw(c157.324,117.946) 157.928,118.551 cw(c158.533,119.155) MEM0.15@157.688,119.288 ; MEM0.15@157.215,118.64 cw(c157.381,117.579) 158.14,118.339 ; MEM0.15@157.839,119.264 ccw(c158.9,119.098) 158.14,118.339
A08: EXT.17 MEM0.17 MEM1.17 MEM2.17 MEM3.17 U1.72 | length 250.7
  Top Layer w0.152: U1.72@106.68,182.88 110.211,182.88 112.192,180.899 137.77,180.899 143.561,175.108 143.561,136.144 144.145,135.56 v1(144.145,132.258) ; U1.72@108.093,182.617 cw(c108.727,181.983) 108.727,182.88 cw(c108.727,183.777) U1.72@108.093,183.143 ; U1.72@108.2,182.51 cw(c109.095,181.615) 109.095,182.88 cw(c109.095,184.145) U1.72@108.2,183.25 ; v1@143.951,132.451 ccw(c143.484,132.919) 144.145,132.919 ccw(c144.806,132.919) v1@144.339,132.451 ; EXT.17@153.695,25.531 ccw(c152.706,25.706) 153.416,26.416 ; MEM3.17@153.813,52.008 cw(c152.447,51.896) 153.416,50.927 ; MEM3.17@153.819,52.186 ccw(c152.758,52.352) 153.518,53.111 ; MEM2.17@153.819,74.391 cw(c152.758,74.225) 153.518,73.465 ; MEM2.17@153.819,74.623 ccw(c152.758,74.789) 153.518,75.548 ; MEM1.17@153.819,96.827 cw(c152.758,96.661) 153.518,95.902 ; MEM1.17@153.819,97.059 ccw(c152.758,97.225) 153.518,97.985 ; MEM0.17@153.819,119.264 cw(c152.758,119.098) 153.518,118.339 ; EXT.17@153.845,25.504 ccw(c153.057,25.644) 153.623,26.209 ccw(c154.188,26.775) EXT.17@154.328,25.987 ; MEM3.17@153.965,52.021 cw(c152.877,51.931) 153.649,51.16 cw(c154.42,50.388) MEM3.17@154.51,51.476 ; MEM3.17@153.97,52.162 ccw(c153.125,52.295) 153.73,52.899 ccw(c154.334,53.504) MEM3.17@154.467,52.659 ; MEM2.17@153.97,74.414 cw(c153.125,74.282) 153.73,73.677 cw(c154.334,73.073) MEM2.17@154.467,73.917 ; MEM2.17@153.97,74.599 ccw(c153.125,74.731) 153.73,75.336 ccw(c154.334,75.941) MEM2.17@154.467,75.096 ; MEM1.17@153.97,96.851 cw(c153.125,96.719) 153.73,96.114 cw(c154.334,95.509) MEM1.17@154.467,96.354 ; MEM1.17@153.97,97.036 ccw(c153.125,97.168) 153.73,97.773 ccw(c154.334,98.377) MEM1.17@154.467,97.533 ; MEM0.17@153.97,119.288 cw(c153.125,119.155) 153.73,118.551 cw(c154.334,117.946) MEM0.17@154.467,118.791 ; EXT.17@153.995,25.478 ccw(c153.409,25.581) 153.83,26.002 ccw(c154.251,26.423) EXT.17@154.354,25.837 ; MEM3.17@154.117,52.034 cw(c153.307,51.967) 153.881,51.392 cw(c154.456,50.818) MEM3.17@154.523,51.628 ; MEM3.17@154.12,52.139 ccw(c153.491,52.237) 153.942,52.687 ccw(c154.392,53.138) MEM3.17@154.49,52.509 ; MEM2.17@154.12,74.438 cw(c153.491,74.339) 153.942,73.889 cw(c154.392,73.439) MEM2.17@154.49,74.068 ; MEM2.17@154.12,74.575 ccw(c153.491,74.674) 153.942,75.124 ccw(c154.392,75.574) MEM2.17@154.49,74.945 ; MEM1.17@154.12,96.875 cw(c153.491,96.776) 153.942,96.326 cw(c154.392,95.876) MEM1.17@154.49,96.505 ; MEM1.17@154.12,97.012 ccw(c153.491,97.111) 153.942,97.561 ccw(c154.392,98.011) MEM1.17@154.49,97.382 ; MEM0.17@154.12,119.311 cw(c153.491,119.213) 153.942,118.763 cw(c154.392,118.312) MEM0.17@154.49,118.941 ; EXT.17@154.301,26.137 cw(c154.126,27.126) 153.416,26.416 ; EXT.17@154.432,25.4 153.416,26.416 ; MEM3.17@154.443,52.81 cw(c154.277,53.871) 153.518,53.111 ; MEM2.17@154.443,73.767 ccw(c154.277,72.706) 153.518,73.465 ; MEM2.17@154.443,75.246 cw(c154.277,76.307) 153.518,75.548 ; MEM1.17@154.443,96.204 ccw(c154.277,95.143) 153.518,95.902 ; MEM1.17@154.443,97.683 cw(c154.277,98.744) 153.518,97.985 ; MEM0.17@154.443,118.64 ccw(c154.277,117.579) 153.518,118.339 ; MEM3.17@154.497,51.324 ccw(c154.385,49.958) 153.416,50.927 ; MEM0.17@154.559,119.38 153.518,118.339 ; 153.416,26.416 153.416,50.927 ; 153.416,50.927 MEM3.17@154.559,52.07 153.518,53.111 ; 153.518,53.111 153.518,73.465 ; 153.518,73.465 MEM2.17@154.559,74.507 153.518,75.548 ; 153.518,75.548 153.518,95.902 ; 153.518,95.902 MEM1.17@154.559,96.943 153.518,97.985 ; 153.518,97.985 153.518,118.339
  Bottom Layer w0.152: v1@144.145,131.984 cw(c144.145,131.323) 144.612,131.79 cw(c145.08,132.258) v1@144.419,132.258 ; v1(144.145,132.258) 150.978,125.425 150.978,118.745 151.384,118.339 153.518,118.339 ; MEM0.17@153.819,119.264 cw(c152.758,119.098) 153.518,118.339 ; MEM0.17@153.97,119.288 cw(c153.125,119.155) 153.73,118.551 cw(c154.334,117.946) MEM0.17@154.467,118.791 ; MEM0.17@154.12,119.311 cw(c153.491,119.213) 153.942,118.763 cw(c154.392,118.312) MEM0.17@154.49,118.941 ; MEM0.17@154.443,118.64 ccw(c154.277,117.579) 153.518,118.339 ; MEM0.17@154.559,119.38 153.518,118.339
A09: EXT.19 MEM0.19 MEM1.19 MEM2.19 MEM3.19 U1.74 | length 246.8
  Top Layer w0.152: U1.74@106.68,180.34 120.599,180.34 120.751,180.492 133.655,180.492 142.265,171.882 142.265,136.195 v1(143.586,134.874) ; U1.74@108.093,180.077 cw(c108.727,179.443) 108.727,180.34 cw(c108.727,181.237) U1.74@108.093,180.603 ; U1.74@108.2,179.97 cw(c109.095,179.075) 109.095,180.34 cw(c109.095,181.605) U1.74@108.2,180.71 ; v1@143.312,134.874 ccw(c142.651,134.874) 143.119,135.341 ccw(c143.586,135.809) v1@143.586,135.148 ; EXT.19@151.155,25.531 ccw(c150.166,25.706) 150.876,26.416 ; MEM3.19@151.273,52.008 cw(c149.907,51.896) 150.876,50.927 ; MEM3.19@151.279,52.186 ccw(c150.218,52.352) 150.978,53.111 ; MEM2.19@151.279,74.391 cw(c150.218,74.225) 150.978,73.465 ; MEM2.19@151.279,74.623 ccw(c150.218,74.789) 150.978,75.548 ; MEM1.19@151.279,96.827 cw(c150.218,96.661) 150.978,95.902 ; EXT.19@151.305,25.504 ccw(c150.517,25.644) 151.083,26.209 ccw(c151.648,26.775) EXT.19@151.788,25.987 ; 151.359,117.958 ccw(c150.837,118.479) MEM0.19@151.424,118.926 ; MEM3.19@151.425,52.021 cw(c150.337,51.931) 151.109,51.16 cw(c151.88,50.388) MEM3.19@151.97,51.476 ; MEM3.19@151.43,52.162 ccw(c150.585,52.295) 151.19,52.899 ccw(c151.794,53.504) MEM3.19@151.927,52.659 ; MEM2.19@151.43,74.414 cw(c150.585,74.282) 151.19,73.677 cw(c151.794,73.073) MEM2.19@151.927,73.917 ; MEM2.19@151.43,74.599 ccw(c150.585,74.731) 151.19,75.336 ccw(c151.794,75.941) MEM2.19@151.927,75.096 ; MEM1.19@151.43,96.851 cw(c150.585,96.719) 151.19,96.114 cw(c151.794,95.509) MEM1.19@151.927,96.354 ; EXT.19@151.455,25.478 ccw(c150.869,25.581) 151.29,26.002 ccw(c151.711,26.423) EXT.19@151.814,25.837 ; 151.482,118.081 ccw(c150.977,118.586) MEM0.19@151.545,119.018 ; MEM1.19@151.49,97.473 ccw(c150.211,98.751) 152.019,98.751 ccw(c153.827,98.751) MEM1.19@152.548,97.473 ; MEM3.19@151.577,52.034 cw(c150.767,51.967) 151.341,51.392 cw(c151.916,50.818) MEM3.19@151.983,51.628 ; MEM3.19@151.58,52.139 ccw(c150.951,52.237) 151.402,52.687 ccw(c151.852,53.138) MEM3.19@151.95,52.509 ; MEM2.19@151.58,74.438 cw(c150.951,74.339) 151.402,73.889 cw(c151.852,73.439) MEM2.19@151.95,74.068 ; MEM2.19@151.58,74.575 ccw(c150.951,74.674) 151.402,75.124 ccw(c151.852,75.574) MEM2.19@151.95,74.945 ; MEM1.19@151.58,96.875 cw(c150.951,96.776) 151.402,96.326 cw(c151.852,95.876) MEM1.19@151.95,96.505 ; MEM1.19@151.597,97.365 ccw(c150.579,98.383) 152.019,98.383 ccw(c153.459,98.383) MEM1.19@152.441,97.365 ; 151.605,118.204 ccw(c151.117,118.692) MEM0.19@151.666,119.111 ; MEM1.19@151.705,97.257 ccw(c150.947,98.015) 152.019,98.015 ccw(c153.091,98.015) MEM1.19@152.333,97.257 ; 151.728,118.327 ccw(c151.257,118.799) MEM0.19@151.787,119.203 ; EXT.19@151.761,26.137 cw(c151.586,27.126) 150.876,26.416 ; 151.852,118.451 ccw(c151.397,118.906) MEM0.19@151.908,119.296 ; EXT.19@151.892,25.4 150.876,26.416 ; MEM3.19@151.903,52.81 cw(c151.737,53.871) 150.978,53.111 ; MEM2.19@151.903,73.767 ccw(c151.737,72.706) 150.978,73.465 ; MEM2.19@151.903,75.246 cw(c151.737,76.307) 150.978,75.548 ; MEM1.19@151.903,96.204 ccw(c151.737,95.143) 150.978,95.902 ; MEM3.19@151.957,51.324 ccw(c151.845,49.958) 150.876,50.927 ; MEM0.19@152.019,119.38 152.019,118.618 150.978,117.577 150.978,107.417 152.019,106.375 MEM1.19@152.019,96.943 150.978,95.902 ; 150.876,26.416 150.876,50.927 ; 150.876,50.927 MEM3.19@152.019,52.07 150.978,53.111 ; 150.978,53.111 150.978,73.465 ; 150.978,73.465 MEM2.19@152.019,74.507 150.978,75.548 ; 150.978,75.548 150.978,95.902
  Bottom Layer w0.152: v1@143.586,134.6 cw(c143.586,133.939) 144.054,134.407 cw(c144.521,134.874) v1@143.86,134.874 ; v1(143.586,134.874) 152.019,126.441 MEM0.19@152.019,119.38 ; MEM0.19@151.49,119.909 ccw(c150.211,121.188) 152.019,121.188 ccw(c153.827,121.188) MEM0.19@152.548,119.909 ; MEM0.19@151.597,119.802 ccw(c150.579,120.82) 152.019,120.82 ccw(c153.459,120.82) MEM0.19@152.441,119.802 ; MEM0.19@151.705,119.694 ccw(c150.947,120.452) 152.019,120.452 ccw(c153.091,120.452) MEM0.19@152.333,119.694
A10: EXT.21 MEM0.21 MEM1.21 MEM2.21 MEM3.21 U1.76 | length 284.5
  Top Layer w0.152: v1@91.729,115.306 ccw(c91.262,115.774) 91.923,115.774 ccw(c92.584,115.774) v1@92.116,115.306 ; v1(91.923,115.113) 91.923,172.161 98.501,178.74 102.946,178.74 103.886,177.8 U1.76@106.68,177.8 ; U1.76@105.16,177.43 ccw(c104.265,176.535) 104.265,177.8 ccw(c104.265,179.065) U1.76@105.16,178.17 ; U1.76@105.267,177.537 ccw(c104.633,176.903) 104.633,177.8 ccw(c104.633,178.697) U1.76@105.267,178.063 ; EXT.21@148.615,25.531 ccw(c147.626,25.706) 148.336,26.416 ; MEM3.21@148.733,52.008 cw(c147.367,51.896) 148.336,50.927 ; MEM3.21@148.739,52.186 ccw(c147.678,52.352) 148.438,53.111 ; MEM2.21@148.739,74.391 cw(c147.678,74.225) 148.438,73.465 ; MEM2.21@148.739,74.623 ccw(c147.678,74.789) 148.438,75.548 ; MEM1.21@148.739,96.827 cw(c147.678,96.661) 148.438,95.902 ; EXT.21@148.765,25.504 ccw(c147.977,25.644) 148.543,26.209 ccw(c149.108,26.775) EXT.21@149.248,25.987 ; 148.819,117.958 ccw(c148.297,118.479) MEM0.21@148.884,118.926 ; MEM3.21@148.885,52.021 cw(c147.797,51.931) 148.569,51.16 cw(c149.34,50.388) MEM3.21@149.43,51.476 ; MEM3.21@148.89,52.162 ccw(c148.045,52.295) 148.65,52.899 ccw(c149.254,53.504) MEM3.21@149.387,52.659 ; MEM2.21@148.89,74.414 cw(c148.045,74.282) 148.65,73.677 cw(c149.254,73.073) MEM2.21@149.387,73.917 ; MEM2.21@148.89,74.599 ccw(c148.045,74.731) 148.65,75.336 ccw(c149.254,75.941) MEM2.21@149.387,75.096 ; MEM1.21@148.89,96.851 cw(c148.045,96.719) 148.65,96.114 cw(c149.254,95.509) MEM1.21@149.387,96.354 ; EXT.21@148.915,25.478 ccw(c148.329,25.581) 148.75,26.002 ccw(c149.171,26.423) EXT.21@149.274,25.837 ; 148.942,118.081 ccw(c148.437,118.586) MEM0.21@149.005,119.018 ; MEM1.21@148.95,97.473 ccw(c147.671,98.751) 149.479,98.751 ccw(c151.287,98.751) MEM1.21@150.008,97.473 ; MEM3.21@149.037,52.034 cw(c148.227,51.967) 148.801,51.392 cw(c149.376,50.818) MEM3.21@149.443,51.628 ; MEM3.21@149.04,52.139 ccw(c148.411,52.237) 148.862,52.687 ccw(c149.312,53.138) MEM3.21@149.41,52.509 ; MEM2.21@149.04,74.438 cw(c148.411,74.339) 148.862,73.889 cw(c149.312,73.439) MEM2.21@149.41,74.068 ; MEM2.21@149.04,74.575 ccw(c148.411,74.674) 148.862,75.124 ccw(c149.312,75.574) MEM2.21@149.41,74.945 ; MEM1.21@149.04,96.875 cw(c148.411,96.776) 148.862,96.326 cw(c149.312,95.876) MEM1.21@149.41,96.505 ; MEM1.21@149.057,97.365 ccw(c148.039,98.383) 149.479,98.383 ccw(c150.919,98.383) MEM1.21@149.901,97.365 ; 149.065,118.204 ccw(c148.577,118.692) MEM0.21@149.126,119.111 ; MEM1.21@149.165,97.257 ccw(c148.407,98.015) 149.479,98.015 ccw(c150.551,98.015) MEM1.21@149.793,97.257 ; 149.188,118.327 ccw(c148.717,118.799) MEM0.21@149.247,119.203 ; EXT.21@149.221,26.137 cw(c149.046,27.126) 148.336,26.416 ; 149.312,118.451 ccw(c148.857,118.906) MEM0.21@149.368,119.296 ; EXT.21@149.352,25.4 148.336,26.416 ; MEM3.21@149.363,52.81 cw(c149.197,53.871) 148.438,53.111 ; MEM2.21@149.363,73.767 ccw(c149.197,72.706) 148.438,73.465 ; MEM2.21@149.363,75.246 cw(c149.197,76.307) 148.438,75.548 ; MEM1.21@149.363,96.204 ccw(c149.197,95.143) 148.438,95.902 ; MEM3.21@149.417,51.324 ccw(c149.305,49.958) 148.336,50.927 ; MEM0.21@149.479,119.38 149.479,118.618 148.438,117.577 148.438,107.417 149.479,106.375 MEM1.21@149.479,96.943 148.438,95.902 ; 148.336,26.416 148.336,50.927 ; 148.336,50.927 MEM3.21@149.479,52.07 148.438,53.111 ; 148.438,53.111 148.438,73.465 ; 148.438,73.465 MEM2.21@149.479,74.507 148.438,75.548 ; 148.438,75.548 148.438,95.902
  Bottom Layer w0.152: v1(91.923,115.113) 132.398,115.113 132.74,115.456 132.74,117.411 133.667,118.339 148.438,118.339 ; v1@92.116,114.919 cw(c92.584,114.452) 92.584,115.113 cw(c92.584,115.774) v1@92.116,115.306 ; MEM0.21@148.739,119.264 cw(c147.678,119.098) 148.438,118.339 ; MEM0.21@148.89,119.288 cw(c148.045,119.155) 148.65,118.551 cw(c149.254,117.946) MEM0.21@149.387,118.791 ; MEM0.21@149.04,119.311 cw(c148.411,119.213) 148.862,118.763 cw(c149.312,118.312) MEM0.21@149.41,118.941 ; MEM0.21@149.363,118.64 ccw(c149.197,117.579) 148.438,118.339 ; MEM0.21@149.479,119.38 148.438,118.339
A11: EXT.23 MEM0.23 MEM1.23 MEM2.23 MEM3.23 U1.78 | length 268
  Top Layer w0.152: U1.78@106.68,175.26 v1(115.672,175.26) ; U1.78@108.093,174.997 cw(c108.727,174.363) 108.727,175.26 cw(c108.727,176.157) U1.78@108.093,175.523 ; U1.78@108.2,174.89 cw(c109.095,173.995) 109.095,175.26 cw(c109.095,176.525) U1.78@108.2,175.63 ; v1@115.478,175.066 ccw(c115.011,174.599) 115.011,175.26 ccw(c115.011,175.921) v1@115.478,175.454 ; 146.152,50.571 ccw(c145.501,51.222) MEM3.23@146.294,51.69 ; MEM0.23@146.199,119.264 cw(c145.138,119.098) 145.898,118.339 ; 146.27,73.093 ccw(c145.748,73.615) MEM2.23@146.339,74.058 ; 146.274,95.525 ccw(c145.752,96.047) MEM1.23@146.341,96.492 ; EXT.23@146.283,25.929 ccw(c145.004,27.208) 146.812,27.208 ccw(c148.62,27.208) EXT.23@147.341,25.929 ; 146.291,50.711 ccw(c145.676,51.326) MEM3.23@146.425,51.767 ; MEM0.23@146.35,119.288 cw(c145.505,119.155) 146.11,118.551 cw(c146.714,117.946) MEM0.23@146.847,118.791 ; EXT.23@146.39,25.822 ccw(c145.372,26.84) 146.812,26.84 ccw(c148.252,26.84) EXT.23@147.234,25.822 ; 146.395,73.217 ccw(c145.89,73.722) MEM2.23@146.461,74.149 ; 146.398,95.649 ccw(c145.894,96.154) MEM1.23@146.463,96.584 ; MEM3.23@146.41,52.599 ccw(c145.131,53.878) 146.939,53.878 ccw(c148.747,53.878) MEM3.23@147.468,52.599 ; MEM2.23@146.41,75.036 ccw(c145.131,76.314) 146.939,76.314 ccw(c148.747,76.314) MEM2.23@147.468,75.036 ; MEM1.23@146.41,97.473 ccw(c145.131,98.751) 146.939,98.751 ccw(c148.747,98.751) MEM1.23@147.468,97.473 ; MEM0.23@146.41,119.909 ccw(c145.131,121.188) 146.939,121.188 ccw(c148.747,121.188) MEM0.23@147.468,119.909 ; 146.43,50.85 ccw(c145.851,51.429) MEM3.23@146.556,51.845 ; EXT.23@146.498,25.714 ccw(c145.74,26.472) 146.812,26.472 ccw(c147.884,26.472) EXT.23@147.126,25.714 ; MEM0.23@146.5,119.311 cw(c145.871,119.213) 146.322,118.763 cw(c146.772,118.312) MEM0.23@146.87,118.941 ; MEM3.23@146.517,52.492 ccw(c145.499,53.51) 146.939,53.51 ccw(c148.379,53.51) MEM3.23@147.361,52.492 ; MEM2.23@146.517,74.928 ccw(c145.499,75.947) 146.939,75.947 ccw(c148.379,75.947) MEM2.23@147.361,74.928 ; MEM1.23@146.517,97.365 ccw(c145.499,98.383) 146.939,98.383 ccw(c148.379,98.383) MEM1.23@147.361,97.365 ; MEM0.23@146.517,119.802 ccw(c145.499,120.82) 146.939,120.82 ccw(c148.379,120.82) MEM0.23@147.361,119.802 ; 146.519,73.342 ccw(c146.032,73.828) MEM2.23@146.583,74.241 ; 146.522,95.773 ccw(c146.035,96.26) MEM1.23@146.585,96.676 ; 146.569,50.989 ccw(c146.026,51.532) MEM3.23@146.688,51.922 ; MEM3.23@146.625,52.384 ccw(c145.867,53.142) 146.939,53.142 ccw(c148.011,53.142) MEM3.23@147.253,52.384 ; MEM2.23@146.625,74.821 ccw(c145.867,75.579) 146.939,75.579 ccw(c148.011,75.579) MEM2.23@147.253,74.821 ; MEM1.23@146.625,97.257 ccw(c145.867,98.015) 146.939,98.015 ccw(c148.011,98.015) MEM1.23@147.253,97.257 ; MEM0.23@146.625,119.694 ccw(c145.867,120.452) 146.939,120.452 ccw(c148.011,120.452) MEM0.23@147.253,119.694 ; 146.643,73.466 ccw(c146.175,73.935) MEM2.23@146.705,74.332 ; 146.646,95.897 ccw(c146.176,96.367) MEM1.23@146.706,96.768 ; 146.708,51.128 ccw(c146.201,51.635) MEM3.23@146.819,51.999 ; 146.768,73.59 ccw(c146.317,74.041) MEM2.23@146.828,74.423 ; 146.77,96.021 ccw(c146.317,96.473) MEM1.23@146.828,96.859 ; EXT.23@146.812,25.4 146.812,37.236 145.796,38.252 145.796,50.216 146.939,51.359 MEM3.23@146.939,52.07 146.939,61.493 145.898,62.535 145.898,72.72 146.939,73.762 MEM2.23@146.939,74.507 146.939,84.214 145.898,85.256 145.898,95.148 146.939,96.19 MEM1.23@146.939,96.943 146.939,106.655 145.898,107.696 145.898,118.339 ; MEM0.23@146.823,118.64 ccw(c146.657,117.579) 145.898,118.339 ; v1@147.355,183.296 cw(c146.888,182.829) 147.549,182.829 cw(c148.21,182.829) v1@147.742,183.296 ; v1(147.549,183.49) 147.549,158.592 147.186,158.229 147.186,122.319 146.939,122.072 MEM0.23@146.939,119.38 145.898,118.339
  Bottom Layer w0.152: v1@115.478,175.454 ccw(c115.011,175.921) 115.672,175.921 ccw(c116.333,175.921) v1@115.865,175.454 ; v1(115.672,175.26) 115.672,175.938 123.223,183.49 v1(147.549,183.49) ; v1@147.355,183.296 ccw(c146.888,182.829) 146.888,183.49 ccw(c146.888,184.151) v1@147.355,183.683